# Allegro board H616_REF_LPDDR3_32X1_4L_V1_0_20200108-v163.brd
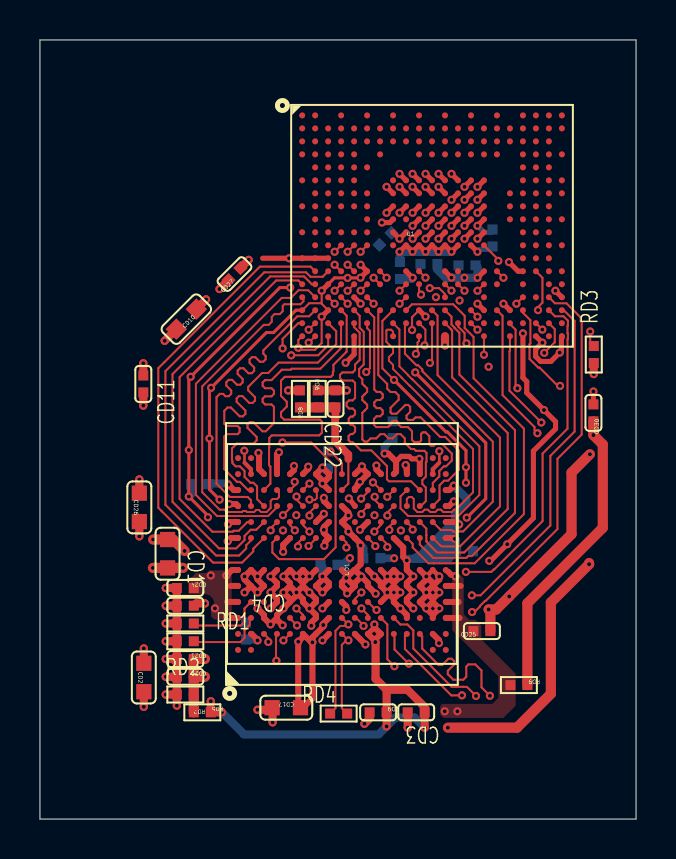
[diagram p0: board, top side]
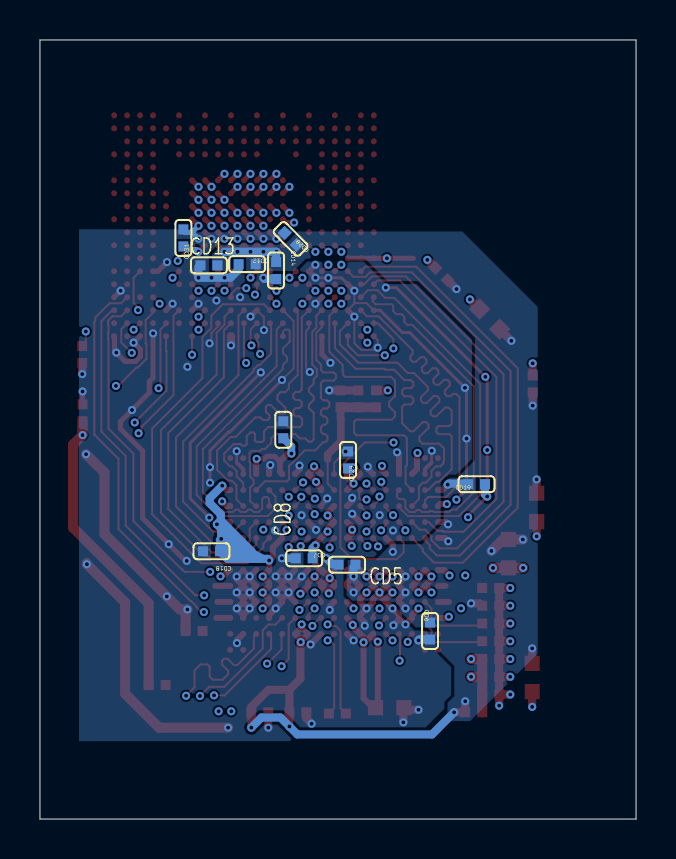
[diagram p1: board, bottom side, seen from below]

Outline 29.84 x 38.99 mm; copper layers: TOP, GND02, POWER03, BOTTOM. Coordinates in mm from the lower left corner of the outline.
Outline path: 0,38.99 0,0 29.84,0 29.84,38.99 0,38.99

## Design rules (mm)
net group DQS-CLK-800MIL: nets SDQS1N SDQS1P
net group DDR-ADD-200MIL: nets SA0 SA1 SA2 SA3 SA4 SA5 SA6 SA7 SA8 SA9
net group DDR-ADD-CLK-500MIL: nets SCKE0 SCKE1 SCS0 SCS1 SODT0
net group DQ0-200MIL: nets SDQ0 SDQ1 SDQ2 SDQ3 SDQ4 SDQ5 SDQ6 SDQ7 SDQM0
net group DQ1-200MIL: nets SDQ8 SDQ9 SDQ10 SDQ11 SDQ12 SDQ13 SDQ14 SDQ15 SDQM1
net group DQ2-200MIL: nets SDQ16 SDQ17 SDQ18 SDQ19 SDQ20 SDQ21 SDQ22 SDQ23 SDQM2
net group DQ3-200MIL: nets SDQ24 SDQ25 SDQ26 SDQ27 SDQ28 SDQ29 SDQ30 SDQ31 SDQM3

## Placement (name value [footprint] x y rotation side)
CD1  10uF  [C0603]  6.39 13.28 270 top
CD2  10uF  [C0603]  5.2 7.08 270 top
CD3  1uF  [C0402]  18.83 5.34 180 top
CD4  1uF  [C0402]  7.28 10.68 180 top
CD5  1uF  [C0402]  14.47 12.73 0 bottom
CD6  100nF  [C0402]  10.31 9.41 270 bottom
CD7  100nF  [C0402]  16.61 13.05 0 bottom
CD8  100nF  [C0402]  17.66 19.48 90 bottom
CD9  100nF  [C0402]  16.93 5.34 180 top
CD10  10uF  [C0603]  7.33 25.02 45 top
CD11  1uF  [C0402]  5.17 21.78 90 top
CD12  1nF  [C0402]  19.47 27.77 0 bottom
CD13  2.2uF  [C0402]  21.38 27.71 0 bottom
CD14  2.2uF  [C0402]  18.02 27.45 270 bottom
CD17  NC/10uF  [C0603]  12.33 5.57 180 top
CD18  NC/1uF  [C0402]  21.25 13.4 0 bottom
CD19  NC/100nF  [C0402]  7.99 16.76 180 bottom
CD20  100nF  [C0402]  7.28 7.12 180 top
CD21  100nF  [C0402]  7.28 8.01 180 top
CD22  100nF  [C0402]  14.79 21.03 90 top
CD24  1uF  [C0402]  7.28 11.56 180 top
CD25  100nF  [C0402]  22.12 9.41 0 top
CD26  NC/10uF  [C0603]  4.98 15.6 270 top
CD27  NC/1uF  [C0402]  9.74 27.27 45 top
CD28  NC/100nF  [C0402]  17.29 29.03 45 bottom
CD29  NC/100nF  [C0402]  14.42 17.97 90 bottom
CD30  1uF  [C0402]  27.71 20.33 90 top
CD31  100nF  [C0402]  22.66 29.08 90 bottom
RD1  240R-1%  [R0402]  7.28 9.79 180 top
RD2  240R-1%  [R0402]  7.28 8.9 180 top
RD3  240R-1%  [R0402]  27.72 23.25 270 top
RD4  100R  [R0402]  14.95 5.28 0 top
RD5  2K-1%  [R0402]  8.13 5.34 180 top
RD6  2K-1%  [R0402]  13.01 21.03 270 top
RD7  2K-1%  [R0402]  7.28 6.23 180 top
RD8  2K-1%  [R0402]  13.9 21.03 90 top
RD9  0R  [R0402]  23.98 6.71 180 top
U1  H616-BGA-284  [BGA284P65B1200_1400H125]  19.63 29.69 0 top
UD1  LPDDR3_FBGA178  [BGA178P65B1150_1300H113]  15.12 13.27 90 top

## Library data of the parts
CD1 CD2 CD10 CD17 CD26 = C-C0603-X5R_0
CD3-CD9 CD11-CD14 CD18-CD22 CD24 CD25 CD27-CD31 = C-C0402-X5R_0
RD1-RD3 RD5 RD6 RD8 RD9 = R-R0402-1%_1
RD4 = R-R0402-5%_0
RD7 = R-R0402-1%_0
U1 = H616-BGA-284
UD1 = LPDDR3-FBGA178

## Footprints (pads in the part's own frame, mm; a bottom-side part is the same pattern mirrored in y, then rotated)
BGA178P65B1150_1300H113
  round 0.3 smd: A1(-4.8,5.2) A2(-4,5.2) A3(-3.2,5.2) A4(-2.4,5.2) A5(-1.6,5.2) A6(-0.8,5.2) A8(0.8,5.2) A9(1.6,5.2) A10(2.4,5.2) A11(3.2,5.2) A12(4,5.2) A13(4.8,5.2) B1(-4.8,4.55) B2(-4,4.55) B3(-3.2,4.55) B4(-2.4,4.55) B5(-1.6,4.55) B6(-0.8,4.55) B8(0.8,4.55) B9(1.6,4.55) B10(2.4,4.55) B11(3.2,4.55) B12(4,4.55) B13(4.8,4.55) C2(-4,3.9) C3(-3.2,3.9) C4(-2.4,3.9) C5(-1.6,3.9) C6(-0.8,3.9) C8(0.8,3.9) C9(1.6,3.9) C10(2.4,3.9) C11(3.2,3.9) C12(4,3.9) D2(-4,3.25) D3(-3.2,3.25) D4(-2.4,3.25) D5(-1.6,3.25) D6(-0.8,3.25) D8(0.8,3.25) D9(1.6,3.25) D10(2.4,3.25) D11(3.2,3.25) D12(4,3.25) E2(-4,2.6) E3(-3.2,2.6) E4(-2.4,2.6) E5(-1.6,2.6) E6(-0.8,2.6) E8(0.8,2.6) E9(1.6,2.6) E10(2.4,2.6) E11(3.2,2.6) E12(4,2.6) F2(-4,1.95) F3(-3.2,1.95) F4(-2.4,1.95) F5(-1.6,1.95) F6(-0.8,1.95) F8(0.8,1.95) F9(1.6,1.95) F10(2.4,1.95) F11(3.2,1.95) F12(4,1.95) G2(-4,1.3) G3(-3.2,1.3) G4(-2.4,1.3) G5(-1.6,1.3) G6(-0.8,1.3) G8(0.8,1.3) G9(1.6,1.3) G10(2.4,1.3) G11(3.2,1.3) G12(4,1.3) H2(-4,0.65) H3(-3.2,0.65) H4(-2.4,0.65) H5(-1.6,0.65) H6(-0.8,0.65) H8(0.8,0.65) H9(1.6,0.65) H10(2.4,0.65) H11(3.2,0.65) H12(4,0.65) J2(-4,0) J3(-3.2,0) J4(-2.4,0) J5(-1.6,0) J6(-0.8,0) J8(0.8,0) J9(1.6,0) J10(2.4,0) J11(3.2,0) J12(4,0) K2(-4,-0.65) K3(-3.2,-0.65) K4(-2.4,-0.65) K5(-1.6,-0.65) K6(-0.8,-0.65) K8(0.8,-0.65) K9(1.6,-0.65) K10(2.4,-0.65) K11(3.2,-0.65) K12(4,-0.65) L2(-4,-1.3) L3(-3.2,-1.3) L4(-2.4,-1.3) L5(-1.6,-1.3) L6(-0.8,-1.3) L8(0.8,-1.3) L9(1.6,-1.3) L10(2.4,-1.3) L11(3.2,-1.3) L12(4,-1.3) M2(-4,-1.95) M3(-3.2,-1.95) M4(-2.4,-1.95) M5(-1.6,-1.95) M6(-0.8,-1.95) M8(0.8,-1.95) M9(1.6,-1.95) M10(2.4,-1.95) M11(3.2,-1.95) M12(4,-1.95) N2(-4,-2.6) N3(-3.2,-2.6) N4(-2.4,-2.6) N5(-1.6,-2.6) N6(-0.8,-2.6) N8(0.8,-2.6) N9(1.6,-2.6) N10(2.4,-2.6) N11(3.2,-2.6) N12(4,-2.6) P2(-4,-3.25) P3(-3.2,-3.25) P4(-2.4,-3.25) P5(-1.6,-3.25) P6(-0.8,-3.25) P8(0.8,-3.25) P9(1.6,-3.25) P10(2.4,-3.25) P11(3.2,-3.25) P12(4,-3.25) R2(-4,-3.9) R3(-3.2,-3.9) R4(-2.4,-3.9) R5(-1.6,-3.9) R6(-0.8,-3.9) R8(0.8,-3.9) R9(1.6,-3.9) R10(2.4,-3.9) R11(3.2,-3.9) R12(4,-3.9) T1(-4.8,-4.55) T2(-4,-4.55) T3(-3.2,-4.55) T4(-2.4,-4.55) T5(-1.6,-4.55) T6(-0.8,-4.55) T8(0.8,-4.55) T9(1.6,-4.55) T10(2.4,-4.55) T11(3.2,-4.55) T12(4,-4.55) T13(4.8,-4.55) U1(-4.8,-5.2) U2(-4,-5.2) U3(-3.2,-5.2) U4(-2.4,-5.2) U5(-1.6,-5.2) U6(-0.8,-5.2) U8(0.8,-5.2) U9(1.6,-5.2) U10(2.4,-5.2) U11(3.2,-5.2) U12(4,-5.2) U13(4.8,-5.2)
BGA284P65B1200_1400H125
  round 0.3 smd: A1(-6.5,5.525) A2(-5.85,5.525) A4(-4.55,5.525) A6(-3.25,5.525) A8(-1.95,5.525) A10(-0.65,5.525) A12(0.65,5.525) A14(1.95,5.525) A16(3.25,5.525) A18(4.55,5.525) A19(5.2,5.525) A20(5.85,5.525) A21(6.5,5.525) B1(-6.5,4.875) B2(-5.85,4.875) B3(-5.2,4.875) B4(-4.55,4.875) B5(-3.9,4.875) B6(-3.25,4.875) B7(-2.6,4.875) B8(-1.95,4.875) B9(-1.3,4.875) B10(-0.65,4.875) B11(0,4.875) B12(0.65,4.875) B13(1.3,4.875) B14(1.95,4.875) B15(2.6,4.875) B16(3.25,4.875) B17(3.9,4.875) B18(4.55,4.875) B19(5.2,4.875) B20(5.85,4.875) B21(6.5,4.875) C1(-6.5,4.225) C2(-5.85,4.225) C3(-5.2,4.225) C4(-4.55,4.225) C5(-3.9,4.225) C6(-3.25,4.225) C7(-2.6,4.225) C8(-1.95,4.225) C9(-1.3,4.225) C10(-0.65,4.225) C11(0,4.225) C12(0.65,4.225) C13(1.3,4.225) C14(1.95,4.225) C15(2.6,4.225) C16(3.25,4.225) C17(3.9,4.225) C18(4.55,4.225) C19(5.2,4.225) C20(5.85,4.225) D1(-6.5,3.575) D2(-5.85,3.575) D3(-5.2,3.575) D4(-4.55,3.575) D5(-3.9,3.575) D7(-2.6,3.575) D10(-0.65,3.575) D11(0,3.575) D12(0.65,3.575) D13(1.3,3.575) D14(1.95,3.575) D15(2.6,3.575) D16(3.25,3.575) D18(4.55,3.575) D19(5.2,3.575) D20(5.85,3.575) D21(6.5,3.575) E2(-5.85,2.925) E3(-5.2,2.925) E4(-4.55,2.925) E5(-3.9,2.925) E6(-3.25,2.925) E18(4.55,2.925) E19(5.2,2.925) E20(5.85,2.925) F1(-6.5,2.275) F2(-5.85,2.275) F3(-5.2,2.275) F4(-4.55,2.275) F5(-3.9,2.275) F8(-1.95,2.275) F9(-1.3,2.275) F10(-0.65,2.275) F11(0,2.275) F12(0.65,2.275) F13(1.3,2.275) F14(1.95,2.275) F15(2.6,2.275) F18(4.55,2.275) F19(5.2,2.275) F20(5.85,2.275) F21(6.5,2.275) G2(-5.85,1.625) G3(-5.2,1.625) G4(-4.55,1.625) G5(-3.9,1.625) G6(-3.25,1.625) G8(-1.95,1.625) G9(-1.3,1.625) G10(-0.65,1.625) G11(0,1.625) G12(0.65,1.625) G13(1.3,1.625) G14(1.95,1.625) G15(2.6,1.625) G17(3.9,1.625) G18(4.55,1.625) G19(5.2,1.625) G20(5.85,1.625) G21(6.5,1.625) H1(-6.5,0.975) H2(-5.85,0.975) H3(-5.2,0.975) H4(-4.55,0.975) H5(-3.9,0.975) H6(-3.25,0.975) H8(-1.95,0.975) H9(-1.3,0.975) H10(-0.65,0.975) H11(0,0.975) H12(0.65,0.975) H13(1.3,0.975) H14(1.95,0.975) H15(2.6,0.975) H17(3.9,0.975) H18(4.55,0.975) H19(5.2,0.975) H20(5.85,0.975) J2(-5.85,0.325) J3(-5.2,0.325) J6(-3.25,0.325) J8(-1.95,0.325) J9(-1.3,0.325) J10(-0.65,0.325) J11(0,0.325) J12(0.65,0.325) J13(1.3,0.325) J14(1.95,0.325) J15(2.6,0.325) J17(3.9,0.325) J18(4.55,0.325) J19(5.2,0.325) J20(5.85,0.325) J21(6.5,0.325) K1(-6.5,-0.325) K2(-5.85,-0.325) K3(-5.2,-0.325) K4(-4.55,-0.325) K5(-3.9,-0.325) K6(-3.25,-0.325) K8(-1.95,-0.325) K9(-1.3,-0.325) K10(-0.65,-0.325) K11(0,-0.325) K12(0.65,-0.325) K13(1.3,-0.325) K14(1.95,-0.325) K15(2.6,-0.325) K18(4.55,-0.325) K19(5.2,-0.325) K20(5.85,-0.325) L2(-5.85,-0.975) L3(-5.2,-0.975) L4(-4.55,-0.975) L5(-3.9,-0.975) L6(-3.25,-0.975) L8(-1.95,-0.975) L9(-1.3,-0.975) L10(-0.65,-0.975) L11(0,-0.975) L12(0.65,-0.975) L13(1.3,-0.975) L14(1.95,-0.975) L15(2.6,-0.975) L18(4.55,-0.975) L19(5.2,-0.975) L20(5.85,-0.975) L21(6.5,-0.975) M1(-6.5,-1.625) M2(-5.85,-1.625) M3(-5.2,-1.625) M18(4.55,-1.625) M19(5.2,-1.625) M20(5.85,-1.625) N2(-5.85,-2.275) N3(-5.2,-2.275) N4(-4.55,-2.275) N5(-3.9,-2.275) N6(-3.25,-2.275) N7(-2.6,-2.275) N9(-1.3,-2.275) N10(-0.65,-2.275) N12(0.65,-2.275) N13(1.3,-2.275) N15(2.6,-2.275) N16(3.25,-2.275) N18(4.55,-2.275) N19(5.2,-2.275) N20(5.85,-2.275) N21(6.5,-2.275) P1(-6.5,-2.925) P2(-5.85,-2.925) P3(-5.2,-2.925) P4(-4.55,-2.925) P5(-3.9,-2.925) P6(-3.25,-2.925) P7(-2.6,-2.925) P9(-1.3,-2.925) P10(-0.65,-2.925) P12(0.65,-2.925) P13(1.3,-2.925) P15(2.6,-2.925) P16(3.25,-2.925) P18(4.55,-2.925) P20(5.85,-2.925) P21(6.5,-2.925) R1(-6.5,-3.575) R2(-5.85,-3.575) R3(-5.2,-3.575) R4(-4.55,-3.575) R5(-3.9,-3.575) R6(-3.25,-3.575) R9(-1.3,-3.575) R12(0.65,-3.575) R15(2.6,-3.575) R18(4.55,-3.575) R19(5.2,-3.575) R20(5.85,-3.575) R21(6.5,-3.575) T1(-6.5,-4.225) T2(-5.85,-4.225) T3(-5.2,-4.225) T4(-4.55,-4.225) T5(-3.9,-4.225) T6(-3.25,-4.225) T7(-2.6,-4.225) T8(-1.95,-4.225) T9(-1.3,-4.225) T10(-0.65,-4.225) T11(0,-4.225) T12(0.65,-4.225) T14(1.95,-4.225) T15(2.6,-4.225) T16(3.25,-4.225) T17(3.9,-4.225) T18(4.55,-4.225) T20(5.85,-4.225) T21(6.5,-4.225) U1(-6.5,-4.875) U2(-5.85,-4.875) U3(-5.2,-4.875) U4(-4.55,-4.875) U5(-3.9,-4.875) U6(-3.25,-4.875) U8(-1.95,-4.875) U9(-1.3,-4.875) U10(-0.65,-4.875) U11(0,-4.875) U12(0.65,-4.875) U13(1.3,-4.875) U14(1.95,-4.875) U15(2.6,-4.875) U16(3.25,-4.875) U17(3.9,-4.875) U18(4.55,-4.875) U19(5.2,-4.875) U20(5.85,-4.875) U21(6.5,-4.875) V1(-6.5,-5.525) V2(-5.85,-5.525) V3(-5.2,-5.525) V5(-3.9,-5.525) V8(-1.95,-5.525) V10(-0.65,-5.525) V12(0.65,-5.525) V15(2.6,-5.525) V17(3.9,-5.525) V19(5.2,-5.525) V20(5.85,-5.525) V21(6.5,-5.525)
C0402
  rect 0.5x0.5 smd: 1(-0.425,0) 2(0.425,0)
C0603
  rect 0.76x0.76 smd: 1(-0.71,0) 2(0.71,0)
R0402
  rect 0.5x0.5 smd: 1(-0.425,0) 2(0.425,0)

## Nets
GND: CD1.2 CD2.2 CD3.2 CD4.2 CD5.2 CD6.2 CD7.2 CD8.2 CD9.2 CD10.2 CD11.2 CD12.2 CD13.2 CD14.2 CD17.2 CD18.2 CD19.2 CD20.2 CD21.2 CD22.2 CD24.2 CD25.2 CD26.2 CD27.2 CD28.2 CD29.2 CD30.2 CD31.2 RD1.2 RD2.2 RD3.2 RD7.2 RD8.2 U1.A1(GND1) U1.A10(GND2) U1.A18(GND3) U1.A21(GND4) U1.B6(GND5) U1.B16(GND6) U1.D19(GND7) U1.F14(GND8) U1.F15(GND9) U1.G13(GND10) U1.G14(GND11) U1.G15(GND12) U1.H10(GND13) U1.H11(GND14) U1.H12(GND15) U1.H13(GND16) U1.H14(GND17) U1.H15(GND18) U1.H19(GND19) U1.J12(GND20) U1.J13(GND21) U1.J14(GND22) U1.J15(GND23) U1.K8(GND25) U1.K9(GND26) U1.K10(GND27) U1.K11(GND28) U1.K12(GND29) U1.K13(GND30) U1.K14(GND31) U1.K15(GND32) U1.L21(GND33) U1.M1(GND24) U1.M2(GND34) U1.M3(GND35) U1.N6(GND36) U1.N9(GND37) U1.N12(GND38) U1.N15(GND39) U1.N18(GND40) U1.P3(GND41) U1.R5(GND42) U1.R21(GND43) U1.T1(GND44) U1.T3(GND45) U1.T8(GND46) U1.T10(GND47) U1.T15(GND48) U1.T17(GND49) U1.U6(GND50) U1.U13(GND51) U1.V1(GND52) U1.V5(GND53) U1.V12(GND54) U1.V19(GND55) U1.V21(GND56) UD1.B2(VSS_0) UD1.B5(VSS_1) UD1.B6(VSSQ_0) UD1.B12(VSSQ_1) UD1.C3(VSSCA_0) UD1.C5(VSS_2) UD1.C6(VSSQ_2) UD1.D3(VSSCA_1) UD1.D12(VSSQ_3) UD1.E4(VSS_3) UD1.E5(VSS_4) UD1.E6(VSSQ_4) UD1.F4(VSSCA_2) UD1.F5(VSS_5) UD1.F6(VSSQ_5) UD1.F12(VSSQ_6) UD1.G3(VSSCA_3) UD1.G4(VSSCA_4) UD1.G6(VSSQ_7) UD1.G9(VSSQ_8) UD1.H2(VSS_6) UD1.H10(VSSQ_9) UD1.J4(VSSCA_5) UD1.J12(VSS_7) UD1.K2(VSS_8) UD1.K10(VSSQ_10) UD1.L6(VSS_9) UD1.L9(VSSQ_11) UD1.M4(VSSCA_6) UD1.M5(VSS_10) UD1.M6(VSSQ_12) UD1.M12(VSSQ_13) UD1.N4(VSS_11) UD1.N5(VSS_12) UD1.N6(VSSQ_14) UD1.P3(VSSCA_7) UD1.P12(VSSQ_15) UD1.R4(VSS_13) UD1.R5(VSS_14) UD1.R6(VSSQ_16) UD1.T2(VSS_15) UD1.T3(VSS_16) UD1.T4(VSS_17) UD1.T5(VSS_18) UD1.T6(VSSQ_17) UD1.T12(VSSQ_18)
VCC18-DRAM: CD30.1 CD31.1 RD9.1 U1.L14(VDD18_DRAM)
VCC-DRAM: CD1.1 CD2.1 CD3.1 CD4.1 CD5.1 CD6.1 CD7.1 CD8.1 CD9.1 CD10.1 CD11.1 CD12.1 CD13.1 CD14.1 CD17.1 CD18.1 CD19.1 CD26.1 CD27.1 CD28.1 CD29.1 RD5.1 RD6.1 U1.L9(VCC_DRAM1) U1.L10(VCC_DRAM2) U1.L11(VCC_DRAM3) U1.L12(VCC_DRAM4) U1.L13(VCC_DRAM5) UD1.A8(VDD2_14) UD1.A9(VDD2_15) UD1.A11(VDDQ_0) UD1.C12(VDDQ_1) UD1.D4(VDD2_0) UD1.D5(VDD2_1) UD1.D6(VDD2_2) UD1.E8(VDDQ_2) UD1.E12(VDDQ_3) UD1.F2(VDDCA_0) UD1.G2(VDDCA_1) UD1.G5(VDD2_3) UD1.G12(VDDQ_4) UD1.H3(VDDCA_2) UD1.H5(VDD2_4) UD1.H6(VDD2_5) UD1.H8(VDDQ_5) UD1.H9(VDDQ_6) UD1.H11(VDDQ_7) UD1.H12(VDD2_16) UD1.J5(VDD2_6) UD1.J6(VDD2_7) UD1.J9(VDDQ_8) UD1.J10(VDDQ_9) UD1.K5(VDD2_8) UD1.K6(VDD2_9) UD1.K8(VDDQ_10) UD1.K11(VDDQ_11) UD1.K12(VDD2_17) UD1.L2(VDDCA_3) UD1.L5(VDD2_10) UD1.L12(VDDQ_12) UD1.M2(VDDCA_4) UD1.N8(VDDQ_13) UD1.N12(VDDQ_14) UD1.P4(VDD2_11) UD1.P5(VDD2_12) UD1.P6(VDD2_13) UD1.R12(VDDQ_15) UD1.U8(VDD2_18) UD1.U9(VDD2_19) UD1.U11(VDDQ_16)
VDD18-LPDDR: CD24.1 CD25.1 RD9.2 UD1.A3(VDD1_0) UD1.A4(VDD1_1) UD1.A5(VDD1_2) UD1.A6(VDD1_3) UD1.A10(VDD1_8) UD1.U3(VDD1_4) UD1.U4(VDD1_5) UD1.U5(VDD1_6) UD1.U6(VDD1_7) UD1.U10(VDD1_9)
VDD-CPU: U1.H8(VDD_CPU1) U1.H9(VDD_CPU2) U1.J8(VDD_CPU3) U1.J9(VDD_CPU4) U1.J10(VDD_CPU5) U1.J11(VDD_CPU6)
VDD-SYS: U1.F9(VDD_GPU1) U1.F10(VDD_GPU2) U1.F11(VDD_SYS1) U1.F12(VDD_SYS2) U1.F13(VDD_SYS3) U1.G8(VDD_GPU3) U1.G9(VDD_GPU4) U1.G10(VDD_SYS4) U1.G11(VDD_SYS5) U1.G12(VDD_SYS6)
SA0: U1.T18(SA2) UD1.R2(CA0)
SA1: U1.N16(SA9) UD1.P2(CA1)
SA2: U1.N19(SA7) UD1.N2(CA2)
SA3: U1.P15(SA5) UD1.N3(CA3)
SA4: U1.R18(SA4) UD1.M3(CA4)
SA5: U1.T16(SA3) UD1.F3(CA5)
SA6: U1.U17(SA1) UD1.E3(CA6)
SA7: U1.V17(SCS0) UD1.E2(CA7)
SA8: U1.U19(SA8) UD1.D2(CA8)
SA9: U1.U20(SA6) UD1.C2(CA9)
SCKE0: U1.V15(SCKE0) UD1.K3(CKE0)
SCKE1: U1.P13(SCKE1) UD1.K4(CKE1)
SCKN: RD4.2 U1.U14(SCKN) UD1.J2(CK_C)
SCKP: RD4.1 U1.T14(SCKP) UD1.J3(CK_T)
SCS0: U1.T20(SODT0) UD1.L3(CS0_N)
SCS1: U1.R20(SCS1) UD1.L4(CS1_N)
SDQ0: U1.N3(SDQ0) UD1.B8(DQ31)
SDQ1: U1.U4(SDQ1) UD1.C10(DQ25)
SDQ2: U1.N2(SDQ2) UD1.C8(DQ27)
SDQ3: U1.T4(SDQ3) UD1.C11(DQ24)
SDQ4: U1.U3(SDQ4) UD1.B11(DQ28)
SDQ5: U1.P1(SDQ5) UD1.B9(DQ30)
SDQ6: U1.T2(SDQ6) UD1.B10(DQ29)
SDQ7: U1.P2(SDQ7) UD1.C9(DQ26)
SDQ8: U1.P5(SDQ8) UD1.F9(DQ10)
SDQ9: U1.V3(SDQ9) UD1.F10(DQ9)
SDQ10: U1.P4(SDQ10) UD1.E10(DQ13)
SDQ11: U1.R4(SDQ11) UD1.E11(DQ12)
SDQ12: U1.R6(SDQ12) UD1.F11(DQ8)
SDQ13: U1.N4(SDQ13) UD1.E9(DQ14)
SDQ14: U1.P6(SDQ14) UD1.F8(DQ11)
SDQ15: U1.N5(SDQ15) UD1.D9(DQ15)
SDQ16: U1.T11(SDQ16) UD1.T8(DQ16)
SDQ17: U1.U12(SDQ17) UD1.R9(DQ21)
SDQ18: U1.T12(SDQ18) UD1.R8(DQ20)
SDQ19: U1.U9(SDQ19) UD1.T9(DQ17)
SDQ20: U1.T6(SDQ20) UD1.T11(DQ19)
SDQ21: U1.U5(SDQ21) UD1.R11(DQ23)
SDQ22: U1.T7(SDQ22) UD1.T10(DQ18)
SDQ23: U1.T5(SDQ23) UD1.R10(DQ22)
SDQ24: U1.R9(SDQ24) UD1.M10(DQ6)
SDQ25: U1.P7(SDQ25) UD1.M9(DQ5)
SDQ26: U1.N7(SDQ26) UD1.M11(DQ7)
SDQ27: U1.P9(SDQ27) UD1.N11(DQ3)
SDQ28: U1.P10(SDQ28) UD1.N9(DQ1)
SDQ29: U1.U11(SDQ29) UD1.N10(DQ2)
SDQ30: U1.P12(SDQ30) UD1.M8(DQ4)
SDQ31: U1.R12(SDQ31) UD1.P9(DQ0)
SDQM0: U1.U1(SDQM0) UD1.D8(DM3)
SDQM1: U1.R3(SDQM1) UD1.G8(DM1)
SDQM2: U1.T9(SDQM2) UD1.P8(DM2)
SDQM3: U1.N10(SDQM3) UD1.L8(DM0)
SDQS0N: U1.R1(SDQS0N) UD1.D11(DQS3_C)
SDQS0P: U1.R2(SDQS0P) UD1.D10(DQS3_T)
SDQS1N: U1.V2(SDQS1N) UD1.G11(DQS1_C)
SDQS1P: U1.U2(SDQS1P) UD1.G10(DQS1_T)
SDQS2N: U1.U8(SDQS2N) UD1.P11(DQS2_C)
SDQS2P: U1.V8(SDQS2P) UD1.P10(DQS2_T)
SDQS3N: U1.U10(SDQS3N) UD1.L11(DQS0_C)
SDQS3P: U1.V10(SDQS3P) UD1.L10(DQS0_T)
SODT0: U1.T21(SA0) UD1.J8(ODT)
SVREF: CD20.1 CD21.1 RD5.2 RD7.1 UD1.H4(VREFCA)
VREFDQ: CD22.1 RD6.2 RD8.1 UD1.J11(VREFDQ)
N17871332: RD3.1 U1.L15(SZQ)
N17954033: RD2.1 UD1.B3(ZQ0)
N17954035: RD1.1 UD1.B4(ZQ1)

Pads without a net: U1 A2 A4 A6 A8 A12 A14 A16 A19 A20 B1 B2 B3 B4 B5 B7 B8 B9 B10 B11 B12 B13 B14 B15 B17 B18 B19 B20 B21 C1 C2 C3 C4 C5 C6 C7 C8 C9 C10 C11 C12 C13 C14 C15 C16 C17 C18 C19 C20 D1 D2 D3 D4 D5 D7 D10 D11 D12 D13 D14 D15 D16 D18 D20 D21 E2 E3 E4 E5 E6 E18 E19 E20 F1 F2 F3 F4 F5 F8 F18 F19 F20 F21 G2 G3 G4 G5 G6 G17 G18 G19 G20 G21 H1 H2 H3 H4 H5 H6 H17 H18 H20 J2 J3 J6 J17 J18 J19 J20 J21 K1 K2 K3 K4 K5 K6 K18 K19 K20 L2 L3 L4 L5 L6 L8 L18 L19 L20 M18 M19 M20 N13 N20 N21 P16 P18 P20 P21 R15 R19 U15 U16 U18 U21 V20; UD1 A1 A2 A12 A13 B1 B13 C4 K9 R3 T1 T13 U1 U2 U12 U13

## Via types
v1: diameter 0.406, hole 0.203, TOP to BOTTOM, 313 vias

## Routing (per net, layer and track width the routed paths; a pad name or vN(x,y) marks a point on that pad's centre or on a via; arc(x,y) is an arc through that point)
GND: length 197.5
  TOP w0.102: 14.08,25.82 14.1,25.84 v1(14.1,26.44) ; 14.08,25.82 U1.T3 ; 14.08,25.82 13.48,25.82 13.13,25.47 U1.T1 ; v1(21.35,23.81) 21.25,23.91 21.25,24.33 20.93,24.66 U1.U13 ; v1(16.33,22.37) 16.52,22.56 16.52,24.43 16.38,24.57 U1.U6 ; v1(14.54,18.39) 15.12,17.82 UD1.J12 ; U1.T8 17.14,24.93 17.14,22.56 v1(17.72,21.98) ; v1(14.1,25.14) 14.1,23.82 13.77,23.49 13.04,23.49 v1(12.93,23.59) 12.93,23.97 U1.V1 ; v1(18.63,24.47) 18.63,25.12 U1.T10
  TOP w0.127: v1(10.23,18.43) 10.24,18.42 10.24,17.84 ; 19.99,17.84 v1(19.99,18.41)
  TOP w0.152: v1(21.36,15.08) 21.45,15.17 21.45,15.17 22.32,16.03 22.32,18.82 v1(18.79,22.35) ; v1(8.41,15.11) 8.41,15.18 v1(7.45,16.14) v1(7.45,18.47) 7.45,22.04 v1(7.54,22.13) 12.01,26.6 v1(12.52,26.6) ; U1.T1 12.81,25.47 11.7,24.35 11.33,24.35 v1(8.57,21.58) 8.49,21.5 8.49,19.04 ; v1(16.05,27.09) 16.04,27.08 v1(15.4,27.08) 14.75,27.08 U1.P3 ; v1(21.33,16.83) v1(21.33,17.61) 21.33,18.44 20.39,19.38 20.32,19.38 v1(17.72,21.98) ; v1(8.48,19.04) 8.49,19.04 ; 8.49,19.04 8.49,16.49 v1(8.99,15.98)
  TOP w0.203: 19.99,17.84 19.67,17.51 UD1.T12 ; 10.24,17.84 10.57,17.51 UD1.B12
  TOP w0.229: v1(19.99,12.14) UD1.T6 v1(19.34,12.14)
  TOP w0.254: U1.K8 v1(18,29.04) U1.K9 ; U1.J15 v1(21.9,29.69) ; U1.G13 v1(20.6,30.99) ; U1.H14 v1(21.25,30.34) ; U1.P3 v1(14.1,26.44) ; U1.H10 v1(18.65,30.34) ; U1.J12 v1(19.95,29.69) ; U1.R21 v1(25.8,26.44) ; v1(15.3,22.83) 15.73,23.26 U1.V5 ; v1(21.9,25.79) U1.T15 ; v1(22.49,12.92) 22.56,12.92 v1(23.39,13.76) 24.7,15.06 24.7,18.42 25.81,19.53 25.81,19.89 25.23,20.47 v1(25.23,20.47) 24.37,21.33 24.37,21.89 24.18,22.09 v1(24.18,24.31) ; U1.K13 v1(20.6,29.04) ; UD1.K10 v1(15.46,16.05) ; U1.F14 v1(21.25,31.64) ; U1.N15 v1(21.9,27.09) ; U1.R5 v1(16.05,25.79) ; U1.G14 v1(21.25,30.99) ; U1.T17 v1(23.2,25.79) ; v1(19.3,25.15) 18.98,25.47 U1.T10 ; U1.H12 v1(19.95,30.34) ; U1.G15 v1(21.9,30.99) ; U1.J13 v1(20.6,29.69) ; U1.H11 v1(19.3,30.34) ; U1.H13 v1(20.6,30.34) ; v1(16.05,27.09) 16.37,27.42 U1.N6 v1(16.05,27.74) ; v1(20.6,27.09) 20.6,27.09 20.6,27.09 U1.N12 ; U1.T3 v1(14.1,25.14) ; 11.15,28.07 v1(12.47,28.07) U1.M1 U1.M2 U1.M3 ; U1.N18 23.94,27.42 v1(23.48,27.87) ; U1.F15 v1(21.9,31.64) ; U1.K15 v1(21.9,29.04) ; U1.V19 v1(25.15,23.84) 25.14,23.84 24.81,23.51 24.81,23.15 25.07,22.9 25.58,22.9 v1(26.02,23.35) 26.1,23.43 26.1,24.06 26.12,24.08 26.12,24.16 U1.V21 ; U1.N9 v1(18.66,27.09) ; U1.K12 v1(19.95,29.04) ; U1.K10 v1(18.65,29.04) ; U1.K14 v1(21.25,29.04) ; U1.J14 v1(21.25,29.69) ; CD30.2 v1(27.71,21.4) ; U1.H15 v1(21.9,30.34) ; U1.K11 v1(19.3,29.04)
  TOP w0.3: v1(12.15,9.7) 11.87,9.98 UD1.D3 ; v1(14.21,15.28) 14.21,15.26 UD1.G9 ; UD1.D12 11.86,17.27 11.86,18.26 v1(11.96,18.36) ; v1(19.34,12.14) 19.67,11.82 UD1.T5 ; v1(19.34,12.14) UD1.R6 ; v1(19.34,12.14) 19.34,11.99 UD1.R5 v1(19.34,11.34) ; v1(13.43,17.64) 13.43,17.53 UD1.F12 ; UD1.B2 10.59,9.27 10.89,8.97 v1(10.89,8.94) ; UD1.T2 19.98,8.95 v1(19.98,8.81) ; v1(13.49,10.54) UD1.F4 13.17,11.02 v1(12.84,11.34) ; v1(13.49,10.54) 13.82,10.22 UD1.G3 13.58,9.83 v1(13.58,9.68) ; v1(13.49,10.54) UD1.G4 13.82,11.02 v1(13.49,11.34) UD1.F5 ; v1(10.89,12.14) 10.89,11.99 UD1.C5 v1(10.89,11.34) UD1.B5 ; v1(10.89,12.14) UD1.B6 v1(10.24,12.14) 10.24,11.99 UD1.B5 ; v1(10.89,12.14) UD1.C6 ; UD1.N5 v1(17.39,11.34) ; UD1.N5 17.72,11.82 ; UD1.N5 v1(18.04,11.34) 17.72,11.02 ; v1(17.39,11.34) 17.39,11.19 UD1.M4 ; v1(17.39,11.34) UD1.M5 ; v1(17.39,11.34) 17.72,11.02 ; 17.72,11.02 UD1.N4 v1(18.04,10.54) 18.37,10.22 UD1.P3 ; v1(12.84,11.34) UD1.F5 ; v1(12.84,11.34) 12.84,11.19 UD1.E4 ; v1(12.84,11.34) UD1.E5 ; UD1.F5 13.17,11.82 ; v1(19.99,12.14) 19.99,11.99 UD1.T5 ; v1(15.33,10.47) 15.33,10.65 UD1.J4 ; UD1.B5 v1(10.24,11.34) ; UD1.T5 v1(19.34,11.34) ; UD1.T5 v1(19.99,11.34) 19.67,11.02 ; v1(19.34,11.34) 19.67,11.02 ; v1(19.34,11.34) 19.34,11.19 UD1.R4 v1(19.34,10.54) ; UD1.L9 16.41,14.87 v1(16.02,14.48) ; 19.67,10.22 19.99,10.54 v1(19.99,10.54) UD1.T4 ; 19.67,10.22 v1(19.34,10.54) ; 19.67,10.22 UD1.T3 ; v1(19.34,10.54) UD1.T4 ; v1(12.84,12.14) UD1.E6 v1(12.19,12.14) 12.52,11.82 UD1.E5 ; v1(12.84,12.14) 13.17,11.82 ; v1(12.84,12.14) UD1.F6 v1(13.49,12.14) ; 13.17,11.82 v1(13.49,12.14) ; 17.72,11.82 v1(17.39,12.14) ; 17.72,11.82 v1(18.04,12.14) UD1.N6 17.39,12.14 v1(17.39,12.14) ; 19.67,11.02 UD1.T4 ; UD1.K2 v1(16.29,8.74) ; UD1.D3 11.87,10.22 v1(12.19,10.54) UD1.E4 ; UD1.D3 v1(11.54,9.74) UD1.C3 11.22,10.22 v1(10.89,10.54) ; v1(14.21,16.08) 14.21,15.92 UD1.H10 ; v1(17.39,12.14) 17.39,11.99 UD1.M5 ; v1(17.39,12.14) UD1.M6 ; UD1.E4 12.52,11.02 v1(12.19,11.34) UD1.E5 ; UD1.L6 v1(16.74,12.14) 17.07,11.82 UD1.M5 ; v1(13.49,12.14) UD1.G6 ; UD1.H2 v1(14.14,8.94) ; v1(18.31,17.72) 18.36,17.66 18.36,17.45 18.37,17.45 UD1.P12 ; v1(16.85,17.69) 16.85,17.49 17.07,17.27 UD1.M12
  TOP w0.406: CD20.2 RD7.2 ; CD20.2 v1(6.3,7.12) ; CD20.2 CD21.2 ; RD7.2 v1(6.3,6.23) ; RD7.2 v1(6.85,5.68) ; CD9.2 16.5,5.03 v1(16.24,4.77) ; CD4.2 CD24.2 v1(6.3,11.56) ; CD4.2 v1(6.3,10.68) ; CD4.2 RD1.2 ; RD2.2 v1(6.3,8.9) ; RD2.2 CD21.2 ; RD2.2 RD1.2 ; CD26.2 v1(4.98,14.15) ; v1(15.36,21.45) CD22.2 RD8.2 ; RD1.2 v1(6.3,9.79) ; RD3.2 v1(27.72,22.27) ; CD11.2 v1(5.17,22.81) ; CD21.2 v1(6.3,8.01) ; U1.V12 v1(20.28,23.71) ; v1(10.89,5.47) 11.65,5.47 v1(11.65,4.84) ; CD10.2 v1(8.32,26.01) ; CD27.2 v1(10.45,27.99) ; CD3.2 v1(18.41,4.57) ; CD2.2 v1(5.2,5.62)
  TOP w0.508: 11.65,5.47 11.62,5.49 CD17.2 ; CD25.2 22.55,10.4 v1(22.46,10.49) 22.84,10.49 v1(23.49,11.14) 26.61,14.26 26.61,17.34 v1(27.53,18.26) ; v1(5.66,12.57) CD1.2 v1(7.16,12.57) ; v1(20.42,4.57) 23.88,4.57 25.58,6.27 25.58,10.84 v1(27.49,12.75) 27.49,12.81
  GND02 w0.254: v1(12.19,10.54) 12.35,10.26 ; v1(18.04,10.54) 17.61,10.08 ; 13,10.11 13.02,10.11 v1(13.49,10.54)
  BOTTOM w0.254: 22.24,29.36 v1(21.9,29.69) ; 22.24,29.36 22.6,29.36 ; 22.24,29.36 22.22,29.36 v1(21.9,29.04)
  BOTTOM w0.381: CD7.2 v1(17.73,13.05) ; v1(14.54,18.39) 14.42,18.39 CD29.2
  BOTTOM w0.406: CD6.2 10.85,8.99 v1(10.89,8.94) ; v1(18.66,27.09) 18.6,27.03 CD14.2 ; CD13.2 21.9,27.62 v1(21.9,27.09) v1(21.25,27.09) 20.6,27.09 v1(20.6,27.09) 20.3,27.09 19.89,27.5 CD12.2 ; v1(7.45,16.14) 7.56,16.25 CD19.2 ; v1(15.52,13.06) 15.21,12.75 15.02,12.75 15,12.73 CD5.2
  vias: v1(12.17,14.44) v1(12.83,15.21) v1(16.75,15.2) v1(18.07,14.44) v1(19.82,26.12) v1(21.01,25.95) v1(22.46,22.64)
VCC18-DRAM: length 31.1
  TOP w0.254: U1.L14 v1(21.9,28.39)
  TOP w0.508: CD30.1 v1(27.71,19.22) 28.17,18.75 28.17,14.57 24.4,10.8 RD9.1
  POWER03 w0.254: v1(27.71,19.22) 28.35,19.86 28.35,26.41 26.8,27.96 24.19,27.96 23.67,28.48 21.99,28.48 v1(21.9,28.39)
  BOTTOM w0.254: v1(21.9,28.39) 22.02,28.51 22.51,28.51 CD31.1
VCC-DRAM: length 108
  TOP w0.254: U1.L13 v1(20.6,28.39) U1.L12 v1(19.95,28.39) U1.L11 v1(19.3,28.39) U1.L10 v1(18.65,28.39) U1.L9 v1(18,28.39) ; 16.74,9.59 16.74,9.59 UD1.L2 ; 17.83,17.9 18.08,18.15 18.33,18.15 18.33,18.15 18.49,18.15 18.61,18.03 v1(18.99,18.03)
  TOP w0.3: UD1.J10 15.44,15.34 15.44,15.25 v1(15.44,15.19) UD1.J9 15.44,14.54 v1(15.44,14.39) UD1.K8 16.05,13.78 v1(16.05,13.69) 16.05,12.75 UD1.K6 ; UD1.K5 15.77,11.82 v1(16.09,12.14) ; UD1.K5 15.73,11.67 v1(15.33,12.07) ; UD1.K5 15.39,11.29 v1(15.38,11.29) 15.38,11.4 UD1.J5 15.12,11.85 v1(15.33,12.07) ; v1(9.41,14.75) 9.53,14.87 UD1.A9 ; 16.12,17.62 v1(16.12,17.65) ; 16.12,17.62 16.02,17.52 UD1.K12 ; 16.12,17.62 16.12,17.56 UD1.L12 16.41,17.27 v1(16.02,16.87) 15.91,16.76 15.91,16.68 15.77,16.54 UD1.K11 ; v1(12.72,17.67) 12.72,17.47 UD1.E12 ; 12.93,5.61 v1(12.93,8.88) 13.17,9.11 UD1.F2 13.59,8.85 v1(13.64,8.85) ; UD1.E8 12.17,13.72 v1(12.17,13.37) ; UD1.N12 17.83,17.38 17.83,17.9 17.43,18.29 v1(17.25,18.29) ; v1(14.14,12.14) 14.47,11.82 UD1.H5 v1(14.14,11.34) UD1.G5 14.14,11.99 v1(14.14,12.14) ; v1(14.14,12.14) UD1.H6 ; 16.79,8.89 16.79,8.99 UD1.M2 16.74,9.59 v1(16.74,9.74) ; 16.79,8.89 UD1.L2 ; 16.79,8.89 v1(16.79,8.86) ; v1(20.71,16.68) 20.49,16.47 UD1.U11 ; v1(15.33,12.07) 15.33,12.25 UD1.J6 ; v1(15.33,12.07) 15.73,12.47 UD1.K6 ; UD1.D6 v1(11.54,12.14) 11.87,11.82 UD1.D5 v1(11.54,11.34) 11.87,11.02 UD1.D4 v1(11.54,10.54) ; v1(14.23,13.67) 14.28,13.72 14.28,13.88 UD1.H8 14.21,14.32 v1(14.21,14.48) 14.21,14.61 UD1.H9 ; UD1.K6 v1(16.09,12.14) ; v1(16.09,12.14) 16.42,11.82 UD1.L5 v1(16.8,11.28) ; v1(14.14,16.79) 14.47,17.11 UD1.H12 v1(14.14,17.59) UD1.G12 14.14,16.94 v1(14.14,16.79) ; v1(14.14,16.79) UD1.H11 ; UD1.C12 10.97,17.51 10.97,18.3 v1(10.94,18.33) ; v1(20.77,14.02) 20.72,14.07 UD1.U8 ; UD1.R12 19.02,18.01 v1(18.99,18.03) ; UD1.H3 14.18,9.78 v1(14.18,9.71) 14.18,9.63 UD1.G2 13.64,9.09 v1(13.64,8.85) ; UD1.U9 20.87,14.87 v1(20.98,14.75) ; UD1.N8 18.18,13.6 18.18,13.13 v1(18.37,12.94) UD1.P6 v1(18.69,12.14) 18.37,11.82 UD1.P5 v1(18.69,11.34) 18.37,11.02 UD1.P4 v1(18.69,10.54) ; v1(9.4,13.9) 9.56,14.07 UD1.A8 ; 12.96,5.57 13.07,5.47 13.64,6.04 v1(13.64,8.85) ; v1(9.43,16.74) 9.7,16.47 UD1.A11
  TOP w0.406: 17.35,6.47 18.4,6.47 19.26,5.61 CD3.1 v1(19.26,4.57) ; 17.35,6.47 CD9.1 v1(17.35,4.63) ; 17.35,6.47 16.8,7.02 16.8,8.84 v1(16.79,8.86) ; CD2.1 v1(5.2,8.54) ; CD26.1 v1(4.98,17) ; v1(12.43,21.45) RD6.1 ; CD4.1 7.82,10.79 v1(8.26,10.79) ; CD11.1 v1(5.17,20.69) ; CD10.1 v1(6.24,23.93) ; CD27.1 v1(8.99,26.53) ; v1(9.11,5.34) RD5.1 v1(8.55,5.9)
  TOP w0.508: v1(5.67,13.99) CD1.1 6.67,13.99 v1(7.24,13.42) ; 12.93,5.61 12.96,5.57 CD17.1
  GND02 w0.381: v1(14.14,17.59) 14.14,17.62 13.63,18.13 13.22,18.13 13.18,18.13 v1(12.72,17.67)
  GND02 w0.406: v1(12.72,17.67) 11.59,17.67 v1(10.94,18.33) ; v1(12.43,21.45) 12.45,21.43 13.86,21.43 14.75,20.54 14.75,18.9 14.75,18.9 15.05,18.61 15.05,18.18 15.01,18.14 15.08,18.08 14.78,17.78 14.75,17.78 14.75,17.69
  BOTTOM w0.254: 19.25,13.41 v1(18.37,12.94)
  BOTTOM w0.381: CD8.1 17.25,18.65 v1(17.25,18.29) ; CD29.1 14.18,17.55 v1(14.14,17.59)
  BOTTOM w0.406: v1(9.11,5.34) 10.21,4.23 16.95,4.23 v1(17.35,4.63) 17.8,5.08 18.75,5.08 v1(19.26,4.57) ; 20.77,14.54 19.67,13.44 19.67,13.41 ; 20.77,14.54 v1(20.98,14.75) 20.79,14.94 ; 20.77,14.54 v1(20.77,14.02) ; 20.79,14.94 20.79,15.25 21.34,15.81 21.34,16.05 v1(20.71,16.68) ; 20.79,14.94 19.25,13.41 19.67,13.41 ; 20.16,13.41 20.82,13.41 CD18.1 ; 20.16,13.41 19.67,13.41 ; 20.16,13.41 v1(20.77,14.02) ; CD7.1 16.19,13.56 v1(16.05,13.69) ; 20.79,14 v1(20.77,14.02) ; 20.79,14 20.79,13.35 ; 20.79,14 20.83,13.96 CD18.1 ; CD18.1 20.45,13.02 18.44,13.02 v1(18.37,12.94) ; v1(20.6,28.39) v1(19.95,28.39) v1(19.3,28.39) v1(18.65,28.39) v1(18,28.39) 18.02,28.37 CD14.1 ; 8.72,16.79 9.38,16.79 v1(9.43,16.74) ; 14.02,12.72 14.14,12.6 v1(14.14,12.14)
VDD18-LPDDR: length 12.1
  TOP w0.102: UD1.U6 20.48,12.47 v1(20.8,12.15)
  TOP w0.254: 20.32,12.45 20.33,12.45 20.57,12.21 20.73,12.21 20.79,12.15 v1(20.8,12.15)
  TOP w0.3: 9.37,10.87 UD1.A4 ; 9.53,11.67 UD1.A5 ; 20.95,10.86 20.95,10.87 UD1.U4 ; v1(20.72,15.9) 20.48,15.67 UD1.U10 ; v1(9.47,15.76) 9.82,15.76 UD1.A10 ; UD1.A3 9.43,10.07 v1(9.37,10.12) ; UD1.A6 9.61,12.47 v1(9.34,12.19) ; 21,10.06 20.99,10.07 UD1.U3 ; UD1.U5 21.07,11.67
  POWER03 w0.381: v1(9.47,15.76) 8.91,15.2 8.91,14.54
  POWER03 w0.406: v1(20.72,15.9) 20.72,15.2 20.26,14.75 20.26,13.81 20.8,13.27 v1(20.8,12.15)
  vias: v1(8.55,12.19) v1(8.76,10.55) v1(20.26,5.39) v1(20.9,5.39)
VDD-CPU: length 2.5
  TOP w0.254: U1.J10 v1(18.65,29.69) ; U1.J11 v1(19.3,29.69) ; U1.H9 v1(18,30.34) ; U1.H8 v1(17.35,30.34) ; v1(17.12,29.85) 17.51,29.85 U1.J8
VDD-SYS: length 4.6
  TOP w0.254: U1.G8 v1(17.35,31.64) ; U1.G12 v1(19.95,31.64) ; U1.G10 v1(18.65,31.64) ; U1.F12 v1(19.95,32.29) ; U1.F9 v1(18,32.29) ; U1.F11 v1(19.3,32.29) ; U1.G11 v1(19.3,31.64) ; U1.F10 v1(18.65,32.29) ; U1.F13 v1(20.6,32.29) ; U1.G9 v1(18,31.64)
Net_168: length 0.5
  TOP w0.102: 15.08,28.72 v1(14.75,28.39)
Net_169: length 0.5
  TOP w0.102: 16.38,28.72 v1(16.05,28.39)
Net_173: length 0.5
  TOP w0.102: 15.73,28.72 v1(15.4,28.39)
SA0: length 30.1
  TOP w0.102: U1.T18 24.18,25.34 24.55,24.97 24.55,23.81 24.51,23.76 24.51,23.03 24.94,22.6 25.01,22.6 25.92,21.68 v1(26.04,21.68) ; v1(22.52,6.17) 22.1,6.59 22.1,7.43 21.8,7.74 21.45,7.74 21.34,7.63 21.34,7.12 21.19,6.97 20.69,6.97 20.42,7.25 20.42,7.42 20.73,7.73 20.73,7.9 20.61,8.02 20.44,8.02 20.13,7.71 19.96,7.71 19.13,8.53 19.13,9.15 UD1.R2
  POWER03 w0.102: v1(26.04,21.68) 26.33,21.38 26.33,9.16 23.34,6.17 v1(22.52,6.17)
SA1: length 33.2
  TOP w0.102: UD1.P2 18.27,9.17 18.27,8.51 20.59,6.19 v1(21.13,6.19) ; U1.N16 v1(23.2,27.09)
  POWER03 w0.102: v1(21.13,6.19) 21.81,5.51 23.69,5.51 27.08,8.89 27.08,24.47 24.45,27.09 v1(23.2,27.09)
SA2: length 28.7
  TOP w0.102: v1(24.93,25.47) 24.93,25.62 25.15,25.84 25.15,27.09 U1.N19 ; v1(18.47,7.78) 18.46,7.78 17.75,8.49 17.75,9.23 UD1.N2
  POWER03 w0.102: v1(18.47,7.78) 20.22,7.78 20.28,7.84 22.5,7.84 24.56,9.9 24.56,19.15 24.55,19.16 24.55,20.66 24.94,21.05 24.94,21.68 24.38,22.24 24.38,22.42 24.5,22.54 24.68,22.54 24.8,22.66 24.8,22.82 24.68,22.94 24.5,22.94 24.38,23.06 24.38,23.23 24.5,23.35 24.67,23.35 24.79,23.47 24.79,23.64 24.67,23.76 24.5,23.76 24.38,23.88 24.38,24.01 24.54,24.16 24.66,24.16 24.78,24.28 24.78,24.45 24.5,24.73 24.5,25.37 24.6,25.47 v1(24.93,25.47)
SA3: length 34
  TOP w0.102: U1.P15 v1(21.9,26.44) ; v1(21.83,6.16) 21.37,6.61 21.2,6.61 21.2,6.62 20.61,6.62 18.69,8.53 18.69,9.44 18.4,9.74 18.04,9.74 UD1.N3
  POWER03 w0.102: v1(21.83,6.16) 22.17,5.81 23.49,5.81 26.69,9.01 26.69,24.34 24.94,26.09 24.06,26.09 24,26.15 22.2,26.15 v1(21.9,26.44)
SA4: length 29
  TOP w0.102: UD1.M3 17.39,9.74 17.39,8 v1(17.74,7.65) ; U1.R18 v1(23.85,25.79)
  POWER03 w0.102: v1(17.74,7.65) 18.24,8.15 22.3,8.15 24.2,10.04 24.2,19.01 24.19,19.01 24.19,20.81 24.58,21.2 24.58,21.54 24.01,22.11 24.01,22.32 23.89,22.44 23.77,22.44 23.65,22.56 23.65,22.72 23.77,22.84 23.89,22.84 24.01,22.96 24.01,23.13 23.89,23.25 23.77,23.25 23.65,23.37 23.65,23.54 23.77,23.66 23.89,23.66 24.01,23.78 24.01,23.94 23.89,24.06 23.77,24.06 23.65,24.18 23.65,24.35 23.77,24.47 23.84,24.47 24.01,24.65 24.01,24.76 23.89,24.88 23.57,24.88 23.45,24.99 23.45,25.16 23.57,25.28 23.89,25.28 24.01,25.4 24.01,25.63 v1(23.85,25.79)
SA5: length 33.2
  TOP w0.102: v1(12.84,10.54) 13.17,10.22 UD1.F3 ; v1(24.9,19.31) 24.76,19.46 24.76,19.62 23.16,21.22 23.16,25.19 U1.T16
  POWER03 w0.102: v1(12.84,10.54) 12.51,10.21 12.51,9.39 12.57,9.32 12.57,8.73 14.19,7.11 20.04,7.11 20.46,7.54 22.7,7.54 24.9,9.74 24.91,9.77 24.91,19.3 v1(24.9,19.31)
SA6: length 28.7
  TOP w0.102: v1(12.87,9.69) 12.52,10.04 UD1.E3 ; U1.U17 23.53,24.77 23.81,24.49 23.81,21.74 23.9,21.65 v1(23.9,21.56)
  POWER03 w0.102: v1(23.9,21.56) 23.9,21.02 23.84,20.95 23.84,18.87 23.85,18.86 23.85,10.19 22.1,8.45 18.04,8.45 17.07,7.48 14.51,7.48 13.28,8.7 13.28,9.27 v1(12.87,9.69)
SA7: length 31.1
  TOP w0.102: UD1.E2 v1(12.19,8.94) ; U1.V17 23.53,23.43 23.51,23.41 23.51,21.44 v1(25.1,19.85)
  POWER03 w0.102: v1(12.19,8.94) 12.19,8.61 14.05,6.75 20.11,6.75 20.59,7.23 22.9,7.23 25.27,9.6 25.27,19.67 v1(25.1,19.85)
SA8: length 33.7
  TOP w0.102: v1(11.84,7.92) 11.82,7.94 11.82,9.22 UD1.D2 ; v1(25.15,24.49) 25.14,24.49 25.14,24.51 U1.U19
  POWER03 w0.102: v1(11.84,7.92) 13.78,5.98 20.2,5.98 20.84,6.62 23.29,6.62 25.98,9.31 25.98,21.16 25.66,21.48 25.66,23.98 v1(25.15,24.49)
SA9: length 32.9
  TOP w0.102: v1(25.25,23.33) 25.77,23.86 25.77,24.52 25.48,24.81 U1.U20 ; v1(11.43,8.86) 11.43,9.05 UD1.C2
  POWER03 w0.102: v1(11.43,8.86) 13.96,6.33 20.12,6.33 20.72,6.93 23.09,6.93 25.62,9.45 25.62,21.01 25.29,21.34 25.29,23.14 25.25,23.19 v1(25.25,23.33)
SCKE0: length 21.1
  TOP w0.102: v1(22.23,23.24) U1.V15 ; v1(16.2,9.67) 16.2,9.69 15.83,10.07 UD1.K3
  POWER03 w0.102: v1(16.2,9.67) 16.31,9.67 16.59,9.38 16.89,9.38 17.38,9.88 20.26,9.88 20.37,9.98 21.76,9.98 22.11,10.33 22.11,12.93 21.84,13.19 21.84,14.56 22.11,14.82 22.11,22.35 22.1,22.36 22.1,23.11 v1(22.23,23.24)
SCKE1: length 22.3
  TOP w0.102: UD1.K4 15.77,11.02 v1(16.09,11.34) ; U1.P13 v1(21.25,26.44)
  POWER03 w0.102: v1(16.09,11.34) 16.45,11.7 20.14,11.7 20.47,11.37 21.23,11.37 21.68,11.81 21.68,12.86 21.49,13.05 21.49,14.7 21.72,14.94 21.72,23.96 21.34,24.33 21.34,25.79 21.52,25.96 21.52,26.17 v1(21.25,26.44)
SCKN: length 32.3
  TOP w0.097: UD1.J2 v1(15.44,8.94) 15.44,8.94 15.33,8.94 15.11,8.72 15.11,5.54 RD4.2 ; U1.U14 v1(21.9,24.49)
  POWER03 w0.097: v1(15.44,8.94) 15.55,8.83 15.88,8.83 16.05,9 16.05,9.18 15.85,9.39 15.02,9.39 14.83,9.19 14.83,8.72 15.18,8.36 16.79,8.36 17.8,9.37 19.6,9.37 19.7,9.48 21.97,9.48 22.81,10.32 22.81,12.13 22.84,12.16 22.84,13.07 22.58,13.33 22.58,14.61 22.82,14.85 22.82,24.32 22.35,24.79 21.95,24.79 21.85,24.69 21.85,24.54 v1(21.9,24.49)
SCKP: length 33.5
  TOP w0.097: RD4.1 14.79,5.54 14.79,9.42 15.04,9.67 15.37,9.67 v1(15.44,9.74) UD1.J3 ; U1.T14 v1(21.9,25.14)
  POWER03 w0.097: v1(21.9,25.14) 21.94,25.11 22.48,25.11 23.13,24.46 23.13,14.72 22.9,14.48 22.9,13.46 23.16,13.2 23.16,12.03 23.13,12 23.13,10.19 22.1,9.16 19.83,9.16 19.73,9.06 17.94,9.06 16.92,8.04 15.05,8.04 14.51,8.59 14.51,9.32 14.89,9.7 15.41,9.7 v1(15.44,9.74)
SCS0: length 26
  TOP w0.102: v1(21.32,12.37) 22.6,12.37 22.72,12.49 22.74,12.49 25.16,14.91 25.16,18.29 26.41,19.54 26.41,24.02 26.43,24.04 26.43,24.29 26.41,24.31 26.41,24.67 26.43,24.69 26.43,24.94 26.21,25.16 25.78,25.16 U1.T20 ; v1(16.09,10.54) 16.42,10.22 UD1.L3
  POWER03 w0.102: v1(21.32,12.37) 21.36,12.33 21.36,11.93 21.1,11.67 20.59,11.67 20.35,11.92 20.35,12.29 20.11,12.52 15.92,12.52 15.73,12.34 15.73,11.19 16.09,10.84 v1(16.09,10.54)
SCS1: length 24.7
  TOP w0.102: v1(21.63,10.36) 21.75,10.36 22.03,10.64 22.03,10.67 22.28,10.92 22.31,10.92 25.91,14.51 25.91,18.03 27.12,19.24 27.12,24.87 27.07,24.92 27.07,25.1 26.36,25.81 25.78,25.81 U1.R20 ; UD1.L4 16.82,10.47 v1(16.85,10.47)
  POWER03 w0.102: v1(16.85,10.47) 17.13,10.18 20.14,10.18 20.24,10.29 21.01,10.29 21.09,10.36 v1(21.63,10.36)
SDQ0: length 23
  TOP w0.102: UD1.B8 10.57,13.95 10.32,13.7 10.32,13.54 9.97,13.19 8.82,13.19 8.61,13.4 6.28,15.73 6.28,22.41 11.23,27.36 13.32,27.36 13.54,27.14 14.15,27.14 U1.N3
SDQ1: length 17.1
  TOP w0.102: U1.U4 15.07,24.81 15.07,23.57 14.04,22.54 12.61,22.54 12.56,22.49 12.1,22.49 12.1,22.48 11.59,21.97 11.27,21.97 11.15,21.85 11.15,21.68 11.27,21.56 11.59,21.56 11.71,21.44 11.71,21.28 11.59,21.16 11.27,21.16 11.15,21.04 11.15,20.87 11.27,20.75 11.59,20.75 11.71,20.63 11.71,19.81 11.31,19.41 11.14,19.41 10.68,19.87 10.51,19.87 10.39,19.75 10.39,19.58 10.85,19.12 10.85,18.95 10.69,18.79 9.85,18.79 9.61,18.55 9.61,17.94 9.64,17.92 9.64,17.81 9.79,17.65 10.01,17.65 10.24,17.42 10.24,17.12 10.54,16.83 10.69,16.83 10.87,16.65 10.87,16.01 UD1.C10
SDQ2: length 24.1
  TOP w0.102: UD1.C8 10.68,13.53 10.68,13.39 10.12,12.83 8.67,12.83 6.11,15.4 5.92,15.58 5.92,22.56 6.22,22.86 11.01,27.65 13.55,27.65 U1.N2
SDQ3: length 16.6
  TOP w0.102: UD1.C11 11.54,16.79 11.54,17.64 11.47,17.71 11.47,18.58 11.48,18.59 11.48,19.08 11.61,19.2 13.98,19.2 14.11,19.33 14.11,19.89 14.01,19.99 12.22,19.99 12.07,20.14 12.07,20.36 12.36,20.65 12.36,20.88 12.07,21.17 12.07,21.94 12.26,22.13 14.56,22.13 14.66,22.23 14.66,22.38 14.69,22.41 14.69,22.73 15.35,23.39 15.35,25.19 U1.T4
SDQ4: length 16.8
  TOP w0.102: U1.U3 14.83,24.41 14.83,23.76 13.91,22.84 11.95,22.84 11.43,22.32 11.12,22.32 10.42,21.63 10.42,21.46 10.76,21.11 10.76,20.95 10.65,20.83 10.48,20.83 10.13,21.17 9.97,21.17 9.85,21.05 9.85,20.88 10.28,20.44 10.28,20.28 10.16,20.16 10,20.16 9.56,20.59 9.39,20.59 9.23,20.43 9.23,19.79 9.35,19.67 9.89,19.67 9.99,19.57 9.99,19.36 9.89,19.26 9.35,19.26 9.23,19.14 9.23,17.51 9.86,16.88 10.01,16.88 10.42,16.47 UD1.B11
SDQ5: length 18.8
  TOP w0.102: U1.P1 12.94,26.95 11.83,26.95 6.99,22.12 6.99,16.02 7.4,15.61 8.63,14.38 9.64,14.38 9.69,14.43 9.95,14.43 10.38,14.87 UD1.B9
SDQ6: length 16.6
  TOP w0.102: UD1.B10 10.57,15.95 10.4,16.12 9.51,16.12 8.84,16.79 8.84,21.12 9,21.28 9.17,21.28 9.29,21.16 9.45,21.16 9.57,21.28 9.57,21.45 9.33,21.69 9.33,21.86 9.45,21.98 9.62,21.98 9.86,21.74 10.03,21.74 10.15,21.86 10.15,22.02 9.9,22.27 9.9,22.44 10.02,22.56 10.19,22.56 10.44,22.31 10.6,22.31 10.72,22.43 10.72,22.6 10.49,22.83 10.49,23 10.61,23.12 10.78,23.12 11.01,22.89 11.18,22.89 11.3,23.01 11.3,23.17 11.18,23.29 11.18,23.46 12.89,25.16 13.47,25.16 U1.T2
SDQ7: length 21.9
  TOP w0.102: UD1.C9 10.83,14.48 10.55,14.48 10.24,14.17 10.24,13.96 9.82,13.55 8.96,13.55 6.64,15.87 6.64,22.27 11.53,27.16 13.22,27.16 13.61,26.77 U1.P2
SDQ8: length 20.2
  TOP w0.102: U1.P5 v1(15.4,26.44) ; v1(13.49,14.39) 13.17,14.72 UD1.F9
  POWER03 w0.102: v1(15.4,26.44) 15,26.85 14.01,26.85 13.75,26.59 13.75,26.25 12.92,25.42 11.38,25.42 9.7,23.75 9.7,18.33 10.58,17.44 10.58,15.93 11.66,14.85 13.03,14.85 v1(13.49,14.39)
SDQ9: length 14.2
  TOP w0.102: v1(12.58,23.21) 13.93,23.21 14.43,23.71 U1.V3 ; UD1.F10 12.84,15.99 v1(12.84,16.14)
  POWER03 w0.102: v1(12.84,16.14) 12.46,16.14 12.04,16.56 12.04,17.93 12.84,18.73 12.84,19.56 12.73,19.67 12.34,19.67 12.23,19.79 12.23,19.96 12.34,20.08 12.73,20.08 12.84,20.2 12.84,20.37 12.73,20.49 12.32,20.49 12.2,20.61 12.2,20.77 12.32,20.89 12.73,20.89 12.84,21.01 12.84,21.9 12.73,22.02 12.31,22.02 12.19,22.14 12.19,22.31 12.31,22.43 12.73,22.43 12.84,22.55 12.84,22.94 v1(12.58,23.21)
SDQ10: length 16.4
  TOP w0.102: U1.P4 v1(14.75,26.44) ; UD1.E10 12.52,15.56 v1(12.16,15.21)
  POWER03 w0.102: v1(14.75,26.44) 13.38,25.07 11.62,25.07 10.06,23.5 10.06,19.11 10.58,18.58 10.58,18.02 10.96,17.64 10.96,16.03 11.78,15.21 v1(12.16,15.21)
SDQ11: length 13.5
  TOP w0.102: UD1.E11 12.75,16.7 v1(12.75,16.88) ; U1.R4 v1(15.4,25.79)
  POWER03 w0.102: v1(15.4,25.79) 15.29,25.68 15.29,25.31 14.56,24.58 14.56,23.96 14.56,23.83 13.56,22.83 13.56,22.6 13.68,22.48 13.88,22.48 14,22.36 14,22.19 13.88,22.08 13.68,22.08 13.56,21.96 13.56,21.79 13.68,21.67 13.88,21.67 14,21.55 14,21.38 13.88,21.26 13.68,21.26 13.56,21.14 13.56,20.98 13.68,20.86 13.88,20.86 14,20.74 14,20.57 13.88,20.45 13.68,20.45 13.56,20.33 13.56,20.16 13.68,20.04 13.88,20.04 14,19.92 14,19.76 13.88,19.64 13.68,19.64 13.56,19.52 13.56,18.18 13.45,18.07 13.28,18.07 13.07,17.87 13.07,17.2 12.75,16.88 v1(12.75,16.88)
SDQ12: length 13.6
  TOP w0.102: UD1.F11 v1(13.49,16.79) ; U1.R6 v1(16.7,25.79)
  POWER03 w0.102: v1(16.7,25.79) 16.7,25.75 16.16,25.21 15.99,25.21 15.85,25.35 15.68,25.35 15.56,25.24 15.56,25.07 15.71,24.92 15.71,24.75 15.59,24.64 15.42,24.64 15.37,24.68 15.2,24.68 15.08,24.57 15.08,24.4 15.13,24.35 15.13,24.18 14.91,23.96 14.91,23.57 14.24,22.9 14.24,22.75 14.58,22.41 14.58,22.24 14.35,22.01 14.35,21.83 14.58,21.6 14.58,21.42 14.35,21.19 14.35,21.02 14.58,20.79 14.58,20.61 14.35,20.38 14.35,20.2 14.58,19.97 14.58,19.32 14.52,19.26 14.04,19.26 13.93,19.16 13.93,18.93 14.16,18.7 14.16,18.52 13.93,18.3 13.93,18.04 13.79,17.89 13.79,17.44 13.92,17.31 13.92,17.22 v1(13.49,16.79)
SDQ13: length 21.1
  TOP w0.102: v1(12.76,14.45) 12.76,14.46 12.73,14.48 12.73,14.5 12.52,14.72 UD1.E9 ; U1.N4 v1(14.75,27.74)
  POWER03 w0.102: v1(14.75,27.74) 13.89,27.74 13.04,26.88 13.04,26.54 12.63,26.14 11.08,26.14 8.95,24.01 8.95,18.02 9.92,17.05 9.92,15.41 11.28,14.05 12.36,14.05 v1(12.76,14.45)
SDQ14: length 17.8
  TOP w0.102: UD1.F8 12.9,13.8 12.9,13.66 v1(12.92,13.64) ; U1.P6 v1(16.05,26.44)
  POWER03 w0.102: v1(16.05,26.44) 16.55,26.44 17.1,25.89 17.1,25.64 15.3,23.83 15.3,23.45 14.94,23.09 14.94,17.67 15.03,17.57 15.03,16.94 14.59,16.5 14.59,14.86 14.72,14.73 14.72,13.56 14.44,13.28 13.27,13.28 v1(12.92,13.64)
SDQ15: length 19.2
  TOP w0.102: v1(11.55,14.45) 11.55,14.55 UD1.D9 ; U1.N5 v1(15.4,27.74)
  POWER03 w0.102: v1(15.4,27.74) 15.05,27.38 14.18,27.38 14.02,27.36 13.39,26.74 13.39,26.4 12.77,25.78 11.23,25.78 9.34,23.9 9.34,18.2 10.25,17.3 10.25,15.75 v1(11.55,14.45)
SDQ16: length 15.6
  TOP w0.102: UD1.T8 20.04,13.7 20.08,13.65 21.03,13.65 23.03,15.65 23.03,19.09 19.9,22.22 19.9,25.19 U1.T11
SDQ17: length 16.9
  TOP w0.102: 23.42,15.52 23.42,15.53 ; 23.42,15.52 23.42,19.32 20.63,22.11 20.63,24.45 20.57,24.51 20.57,24.52 U1.U12 ; 23.42,15.52 21.24,13.34 20.18,13.34 19.89,13.34 19.34,13.89 19.34,13.93 19.34,13.93 19.34,14.2 19.34,14.2 19.34,14.54 UD1.R9
SDQ18: length 17.9
  TOP w0.102: UD1.R8 19.02,13.74 19.68,13.07 19.78,13.07 20.85,13.07 21.12,13.07 21.35,13.07 21.44,13.16 21.62,13.16 23.78,15.32 23.78,19.46 21,22.25 21,24.34 20.75,24.58 20.75,24.6 20.6,24.75 20.6,25.14 U1.T12
SDQ19: length 14.6
  TOP w0.102: U1.U9 18.27,24.76 18.27,24.62 18.27,24.62 18.27,23.29 18.85,22.71 18.93,22.71 19.14,22.5 19.14,22.42 22.67,18.89 22.67,15.88 21.18,14.39 20.68,14.39 20.6,14.47 20.07,14.47 UD1.T9
SDQ20: length 15.3
  TOP w0.102: UD1.T11 19.67,16.82 19.99,17.14 19.99,17.42 20.22,17.65 20.33,17.65 20.62,17.94 20.62,18.29 20.14,18.77 19.79,18.77 19.71,18.68 19.56,18.68 19.49,18.76 19.49,19.16 19.3,19.35 19.16,19.35 19.08,19.27 19.08,18.94 19.01,18.87 18.72,18.87 18.62,18.97 18.62,19.41 18.41,19.62 18.08,19.62 17.96,19.74 17.96,19.81 17.84,19.93 17.67,19.93 17.55,19.81 17.55,19.74 17.43,19.62 16.84,19.62 16.72,19.74 16.72,20.03 16.85,20.16 17.04,20.16 17.16,20.28 17.16,20.45 17.04,20.57 16.85,20.57 16.73,20.69 16.73,20.85 16.85,20.97 17.04,20.97 17.16,21.09 17.16,21.26 17.04,21.38 16.85,21.38 16.73,21.5 16.73,25.11 U1.T6
SDQ21: length 13.4
  TOP w0.102: UD1.R11 18.58,16.9 17.47,16.9 17.37,17 17.37,17.67 16.59,18.45 16.07,18.45 15.66,18.86 15.55,18.86 15.45,18.96 15.45,19.17 15.55,19.27 15.66,19.27 15.77,19.39 15.77,19.62 15.66,19.73 15.56,19.73 15.46,19.84 15.46,20.04 15.56,20.14 15.66,20.14 15.77,20.26 15.77,20.43 15.66,20.55 15.47,20.55 15.35,20.67 15.35,20.83 15.47,20.95 15.66,20.95 15.77,21.07 15.77,21.83 15.66,21.95 15.14,21.95 15.02,22.06 15.02,22.23 15.14,22.35 15.66,22.35 15.77,22.47 15.77,22.75 16.01,22.98 16.01,24.34 15.73,24.62 U1.U5
SDQ22: length 14.6
  TOP w0.102: U1.T7 16.94,25.38 16.94,22.22 17.38,21.78 17.38,21.54 17.55,21.37 17.79,21.37 17.96,21.2 17.96,20.99 17.55,20.58 17.55,20.35 17.61,20.29 17.85,20.29 18.29,20.73 18.43,20.73 18.53,20.63 18.53,20.38 18.35,20.19 18.35,20.05 18.43,19.97 18.67,19.97 18.8,20.1 19.06,20.1 20.04,19.12 20.29,19.12 20.97,18.44 20.97,17.79 20.97,17.79 20.97,17.48 20.43,16.93 20.23,16.93 20,16.7 20,16 UD1.T10
SDQ23: length 14.3
  TOP w0.102: UD1.R10 19.07,15.67 19.32,15.91 19.32,16.59 19.14,16.77 19.14,16.96 19.32,17.14 19.32,17.85 19.35,17.88 19.35,18.33 19.25,18.43 18.82,18.43 18.73,18.52 18.58,18.52 18.27,18.83 18.27,18.84 18.27,18.84 18.27,19.05 18.05,19.26 17.86,19.26 17.65,19.05 17.45,19.05 17.24,19.26 17.05,19.26 16.83,19.05 16.55,19.05 16.39,18.89 16.25,18.89 16.14,19 16.14,20.33 16.26,20.45 16.26,20.45 16.38,20.57 16.38,20.74 16.26,20.85 16.26,20.85 16.14,20.97 16.14,21.14 16.26,21.26 16.26,21.26 16.38,21.38 16.38,21.55 16.26,21.67 16.26,21.67 16.14,21.79 16.14,22.02 15.98,22.18 15.98,22.52 16.21,22.75 16.21,24.38 16,24.59 16,25.19 U1.T5
SDQ24: length 13
  TOP w0.102: v1(16.76,16.13) 16.76,16.1 16.76,16.09 16.76,15.97 UD1.M10 ; U1.R9 v1(18,25.79)
  POWER03 w0.102: v1(18,25.79) 17.84,25.63 17.84,24.96 17.85,24.95 17.85,24.59 16.95,23.69 16.95,22.08 16.49,21.62 16.49,20.71 16.37,20.59 16.26,20.59 16.14,20.48 16.14,20.31 16.26,20.19 16.37,20.19 16.49,20.07 16.49,19.9 16.37,19.78 16.26,19.78 16.14,19.66 16.14,19.49 16.26,19.38 16.37,19.38 16.49,19.26 16.49,19.09 16.37,18.97 16.26,18.97 16.14,18.85 16.14,18.68 16.26,18.56 16.37,18.56 16.49,18.44 16.49,17.54 17.08,16.96 17.08,16.81 17.03,16.77 17.03,16.4 v1(16.76,16.13)
SDQ25: length 16.8
  TOP w0.102: UD1.M9 17.07,14.72 v1(16.74,14.39) ; U1.P7 v1(16.7,27.09)
  POWER03 w0.102: v1(16.74,14.39) 16.3,14.83 15.21,14.83 14.95,15.1 14.95,16.35 15.39,16.79 15.39,17.72 15.29,17.81 15.29,20.87 15.39,20.97 15.39,20.98 15.71,21.31 15.71,21.6 15.29,22.03 15.29,22.32 15.66,22.68 15.66,23.68 17.24,25.27 17.24,25.39 17.31,25.46 17.31,26.1 16.7,26.71 v1(16.7,27.09)
SDQ26: length 12.8
  TOP w0.102: UD1.M11 16.68,16.85 v1(16.67,16.85) ; U1.N7 v1(17.35,27.09)
  POWER03 w0.102: v1(16.67,16.85) 16.4,17.12 16.4,17.13 16.3,17.23 16.04,17.23 15.74,17.52 15.74,17.86 15.65,17.96 15.65,20.72 16.07,21.15 16.07,21.75 15.98,21.84 15.98,22.5 16.01,22.54 16.01,23.33 17.49,24.81 17.49,25.28 17.62,25.42 17.62,26.82 v1(17.35,27.09)
SDQ27: length 13.3
  TOP w0.102: U1.P9 v1(18,26.44) ; UD1.N11 17.39,16.14 v1(17.39,16.13)
  POWER03 w0.102: v1(18,26.44) 18.52,26.44 18.62,26.34 18.62,25.58 18.27,25.23 18.27,24.51 17.32,23.56 17.32,21.93 16.87,21.48 16.87,21.25 16.98,21.13 17.1,21.01 17.1,20.84 16.99,20.72 16.87,20.6 16.87,20.44 16.98,20.32 17.1,20.2 17.1,20.03 16.99,19.91 16.87,19.79 16.87,19.62 16.98,19.5 17.1,19.39 17.1,19.22 16.99,19.1 16.87,18.98 16.87,18.17 17.2,17.84 17.2,17.38 17.39,17.19 v1(17.39,16.13)
SDQ28: length 14.6
  TOP w0.102: UD1.N9 17.49,14.64 v1(17.49,14.47) ; U1.P10 18.98,26.34 v1(19.08,26.25)
  POWER03 w0.102: v1(19.08,26.25) 19.08,25.58 18.91,25.41 18.91,24.82 19.62,24.11 19.62,23.23 19.88,22.97 19.88,19.36 19.33,18.82 19.33,18.19 19.35,18.17 19.35,17.79 19.07,17.5 19.07,15.6 18.27,14.8 17.82,14.8 v1(17.49,14.47)
SDQ29: length 13.2
  TOP w0.102: v1(17.39,15.19) 17.39,15.34 UD1.N10 ; U1.U11 19.63,22.93 v1(19.52,22.83)
  POWER03 w0.102: v1(17.39,15.19) 17.48,15.1 18.14,15.1 18.66,15.63 18.66,17.87 18.59,17.94 18.59,18.58 19.45,19.44 19.45,19.82 19.33,19.94 19.19,19.94 19.07,20.06 19.07,20.23 19.19,20.34 19.33,20.34 19.45,20.46 19.45,20.63 19.33,20.75 19.19,20.75 19.07,20.87 19.07,21.04 19.19,21.16 19.33,21.16 19.45,21.28 19.45,21.44 19.33,21.56 19.19,21.56 19.07,21.68 19.07,21.85 19.19,21.97 19.33,21.97 19.45,22.09 19.45,22.76 v1(19.52,22.83)
SDQ30: length 16.4
  TOP w0.102: U1.P12 20.6,26.45 20.6,26.44 v1(20.6,26.44) ; v1(17.39,13.61) 17.39,13.74 UD1.M8
  POWER03 w0.102: v1(17.39,13.61) 18.8,13.61 19.75,14.57 19.75,14.96 20.19,15.39 20.19,16.97 21.06,17.85 21.06,23.6 20.99,23.67 20.99,25.46 20.6,25.85 v1(20.6,26.44)
SDQ31: length 14.8
  TOP w0.102: v1(19.51,26.57) 19.98,26.57 20.28,26.28 U1.R12 ; v1(18.66,14.48) 18.66,14.57 UD1.P9
  POWER03 w0.102: v1(19.51,26.57) 19.43,26.49 19.43,25.86 19.99,25.31 19.99,23.92 19.92,23.85 19.92,23.56 20.35,23.13 20.35,19.36 19.64,18.65 19.64,18.32 19.65,18.3 19.65,17.57 19.44,17.35 19.44,15.54 18.93,15.03 18.93,14.75 v1(18.66,14.48)
SDQM0: length 18.4
  TOP w0.102: v1(12.15,23.55) 12.15,24.03 12.93,24.82 U1.U1 ; UD1.D8 11.63,13.83 11.63,13.34 11.97,13.01 14.21,13.01 14.8,13.6 14.8,15.29 14.8,16.38 14.8,17.63 13.58,18.85 v1(12.14,18.85)
  POWER03 w0.102: v1(12.15,23.55) 11.74,23.15 11.74,19.7 12.14,19.3 v1(12.14,18.85)
SDQM1: length 15.6
  TOP w0.102: U1.R3 v1(14.75,25.79) ; UD1.G8 13.82,14.04 v1(13.45,13.67)
  POWER03 w0.102: v1(13.45,13.67) 13.86,14.08 13.86,16.25 13.67,16.43 13.22,16.43 13.14,16.52 12.61,16.52 12.36,16.77 12.36,17.82 12.62,18.08 12.75,18.08 13.2,18.53 13.2,22.98 14.2,23.98 14.2,24.74 14.75,25.29 v1(14.75,25.79)
SDQM2: length 22
  TOP w0.102: U1.T9 18.62,25.76 20.69,25.76 21.26,25.19 21.26,24.57 21.71,24.13 21.71,22.06 24.23,19.54 24.23,15.26 21.77,12.8 21.57,12.8 19.98,12.8 19.45,12.8 18.66,13.59 18.66,13.77 UD1.P8
SDQM3: length 17.8
  TOP w0.102: UD1.L8 16.79,13.69 v1(16.79,13.66) ; v1(19.3,27.09) 19.3,27.09 19.3,27.1 U1.N10
  POWER03 w0.102: v1(19.3,27.09) 19.7,27.09 20.22,26.57 20.22,25.76 20.46,25.51 20.46,24.02 20.63,23.85 20.63,23.52 20.7,23.45 20.7,18.12 19.81,17.23 19.81,15.45 19.45,15.08 19.45,14.77 18.67,13.99 17.12,13.99 v1(16.79,13.66)
SDQS0N: length 18
  TOP w0.097: UD1.D11 11.97,16.36 11.97,16.11 11.87,16.02 11.64,16.02 11.55,15.92 11.55,15.57 11.34,15.36 11.07,15.36 10.96,15.47 10.83,15.47 10.72,15.36 10.36,15.36 10.31,15.42 10.17,15.42 10.11,15.36 9.35,15.36 9.23,15.48 8.99,15.48 8.12,16.36 8.12,21.65 11.2,24.74 11.45,24.74 11.6,24.88 11.6,25.13 11.74,25.27 12.01,25.27 12.15,25.42 12.15,25.68 12.23,25.77 13.04,25.77 13.19,25.91 13.19,26.05 U1.R1
SDQS0P: length 18.4
  TOP w0.097: U1.R2 13.43,26.47 12.95,26.47 12.56,26.08 12.1,26.08 7.81,21.79 7.81,16.22 8.86,15.17 11.43,15.17 11.86,15.61 11.86,15.66 UD1.D10
SDQS1N: length 13.9
  TOP w0.097: UD1.G11 13.86,16.42 13.86,16.06 13.76,15.96 13.52,15.96 v1(13.49,15.99) ; U1.V2 v1(13.45,23.84)
  POWER03 w0.097: v1(13.45,23.84) 13.45,23.96 13.36,24.06 12,24.06 11.08,23.14 11.08,19.23 11.42,18.88 11.61,18.69 11.61,16.51 12.34,15.78 13.11,15.78 13.34,15.55 13.53,15.55 13.62,15.65 13.62,15.86 v1(13.49,15.99)
SDQS1P: length 14
  TOP w0.097: v1(13.49,15.19) 13.49,15.34 UD1.G10 ; U1.U2 v1(13.45,24.49)
  POWER03 w0.097: v1(13.45,24.49) 13.34,24.38 11.87,24.38 10.76,23.27 10.76,19.09 11.29,18.56 11.29,16.45 12.18,15.56 12.99,15.56 13.36,15.19 v1(13.49,15.19)
SDQS2N: length 16
  TOP w0.097: UD1.P11 18.07,16.17 18.05,16.15 18.05,15.55 18.43,15.17 20.94,15.17 22,16.22 22,18.65 18.65,22 18.64,22 18.43,22.21 18.43,22.22 17.99,22.66 17.99,24.5 U1.U8
SDQS2P: length 15.6
  TOP w0.097: UD1.P10 18.37,16.02 18.46,16.11 18.62,16.11 18.71,16.01 18.71,15.54 18.89,15.37 19.14,15.37 19.26,15.48 19.42,15.48 19.54,15.37 19.79,15.37 19.91,15.48 20.07,15.48 20.19,15.37 20.61,15.37 20.73,15.48 20.81,15.48 21.68,16.35 21.68,18.52 18.52,21.68 18.51,21.68 18.12,22.08 18.12,22.09 17.68,22.52 17.68,22.73 17.47,22.94 17.47,23.12 17.68,23.33 17.68,23.55 17.34,23.88 17.34,24.45 17.38,24.49 17.58,24.49 17.68,24.39 U1.V8
SDQS3N: length 13.4
  TOP w0.097: v1(19.25,23.71) 19.29,23.75 19.29,24.5 U1.U10 ; UD1.L11 16.42,16.37 v1(16.08,16.04)
  POWER03 w0.097: v1(19.25,23.71) 18.95,24.01 18.45,24.01 18.04,23.6 18.04,22.16 18.08,22.12 18.08,19.08 17.87,18.88 17.87,18.3 17.79,18.22 17.79,18.22 17.6,18.04 17.6,17.44 17.94,17.1 17.94,15.93 17.84,15.83 17.65,15.83 17.59,15.77 16.34,15.77 v1(16.08,16.04)
SDQS3P: length 12.9
  TOP w0.097: UD1.L10 16.09,15.34 v1(16.09,15.26) ; v1(18.82,23.28) 18.91,23.37 18.91,23.41 18.9,23.42 18.9,23.85 18.98,23.93 U1.V10
  POWER03 w0.097: v1(16.09,15.26) 16.09,15.34 16.31,15.56 17.59,15.56 17.65,15.51 17.97,15.51 18.26,15.8 18.26,17.23 17.92,17.57 17.92,17.9 18.19,18.17 18.19,18.75 18.39,18.95 18.39,22.25 18.36,22.29 18.36,23.47 18.58,23.69 18.72,23.69 18.82,23.6 v1(18.82,23.28)
SODT0: length 28.2
  TOP w0.102: UD1.J8 15.34,13.84 v1(15.34,13.59) ; v1(21.62,11.2) 22.05,11.2 25.55,14.69 25.55,18.18 26.76,19.39 26.76,24.92 26.22,25.47 U1.T21
  POWER03 w0.102: v1(21.62,11.2) 21.49,11.2 21.08,10.79 20.97,10.68 20.36,10.68 20.11,10.92 16.66,10.92 16.49,10.76 16.49,10.3 16.38,10.18 15.82,10.18 15.72,10.29 15.72,10.6 15.46,10.86 15.31,10.86 14.98,11.19 14.98,13.23 v1(15.34,13.59)
